# Altium PCB LOGi-SDR.PcbDoc
Units mil, origin at the board's own origin, x right, y up, seen from the top; angles counter-clockwise.
Board outline 2700 x 1700 mil, 4 copper layers (Top Layer, GND, VDD, Bottom Layer); 4 components, 0 nets, 130 pads, 36 vias.
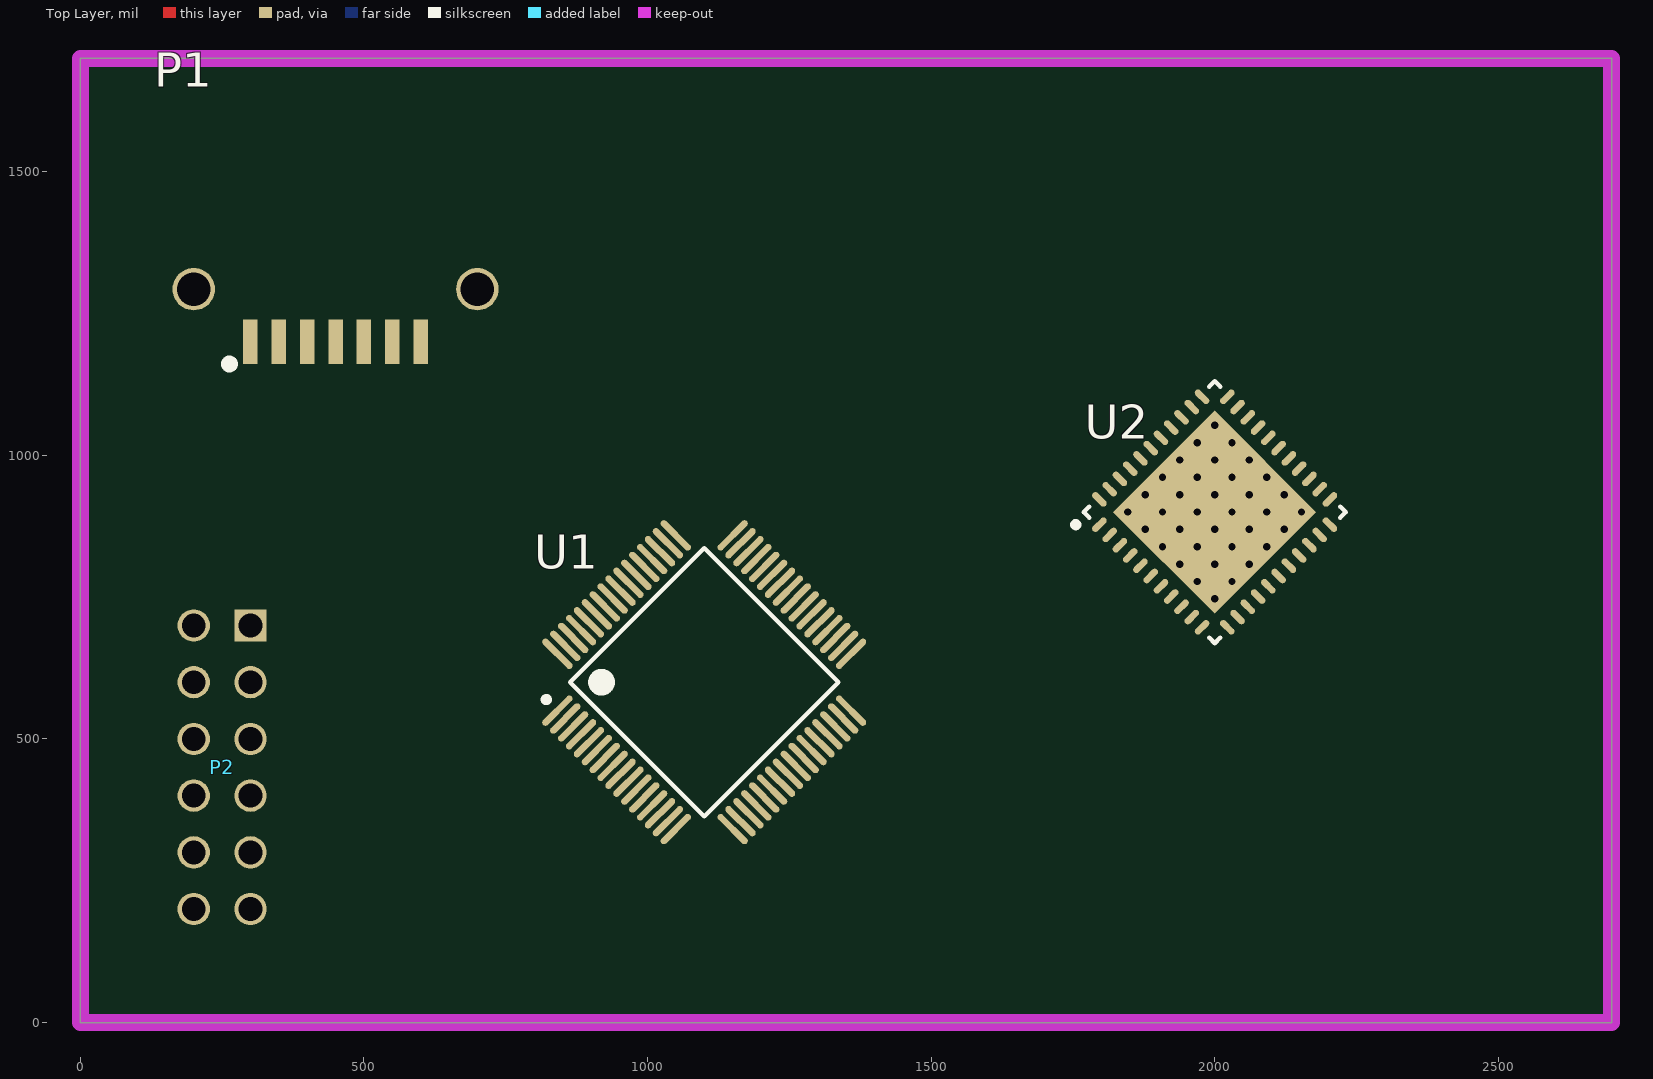
[diagram p0: Top Layer view]
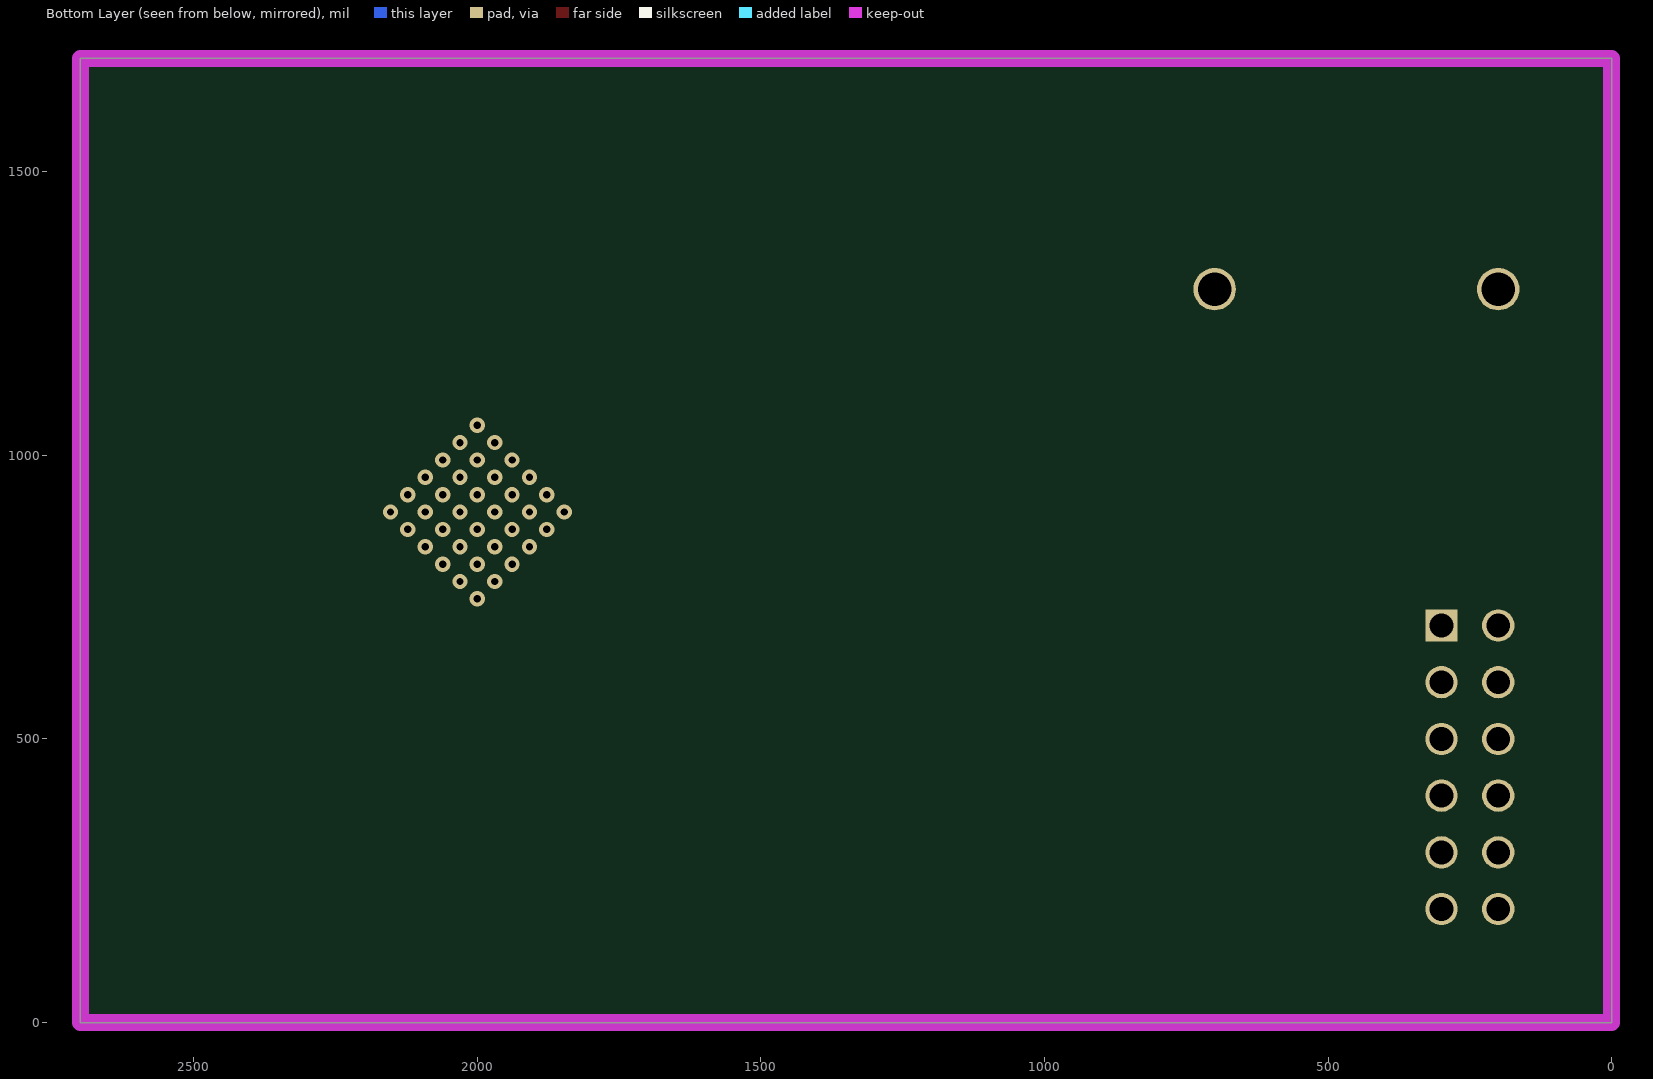
[diagram p1: Bottom Layer view, seen from below]

## Layer stack, top to bottom
Top Layer: signal copper 1.4
Dielectric: core 12.6, FR-4, Dk 4.8
GND: signal copper 1.4
Dielectric: prepreg 12.6, FR-4, Dk 4.8
VDD: signal copper 1.4
Dielectric: core 12.6, FR-4, Dk 4.8
Bottom Layer: signal copper 1.4

## Board outline
0,0 2700,0 2700,1700 0,1700

## Design rules (kind name [scope] priority, off if disabled: settings)
Clearance POLY_IN_BGA [(WithinRoom('BGA_INNER'))] p1: gap=6
Clearance POLY_TO_POLY [inpoly vs inpoly] p2: gap=12
Clearance [All] p3: gap=6
FabricationTestPointUsage TestPointUsage [All] p1: valid=0 allowmultiple=FALSE
FabricationTestpoint Testpoint [All] p1: side=3 testpointundercomponent=TRUE minsize=40 maxsize=100 preferedsize=60 minholesize=0 maxholesize=40 preferedholesize=32 testpointgrid=1 allowsidetop=TRUE allowsidebottom=TRUE usegrid=TRUE gridtolerance=0.01
PlaneClearance [All] p1: clearance=10
PlaneConnect via-plane [isvia] p1: planeconnectstyle=Direct reliefexpansion=20 reliefentries=4 reliefconductorwidth=10 reliefairgap=10
PlaneConnect [All] p2: planeconnectstyle=Relief reliefexpansion=20 reliefentries=4 reliefconductorwidth=10 reliefairgap=10
PolygonConnect via-poly [isvia] p1: connectstyle=Direct reliefconductorwidth=10 reliefentries=4 polygonreliefangle="90 Angle" airgapwidth=10
PolygonConnect [All] p2: connectstyle=Relief reliefconductorwidth=10 reliefentries=4 polygonreliefangle="90 Angle" airgapwidth=10
RoutingLayers [All] p1: top layer_v5=TRUE mid layer 1_v5=FALSE mid layer 2_v5=FALSE bottom layer_v5=TRUE
RoutingVias [All] p1: holewidth=13 width=27 viastyle="Through Hole" minholewidth=13 minwidth=27 maxholewidth=25 maxwidth=40
SilkscreenOverComponentPads [All] p1: minsilkscreentomaskgap=10
SolderMaskExpansion VIA [isvia and not(locked)] p1: expansion=-100
SolderMaskExpansion SolderMaskExpansion_1 [All] p2: expansion=4
Width differentila-pair [inDifferentialPair(HDMI_D1) or inDifferentialPair(HDMI_D2) or inDifferentialPair(HDMI_D3) or inDifferentialPair(HDMI_D4)] p1: maxlimit=10 minlimit=10 preferedwidth=10
Width [All] p2: maxlimit=30 minlimit=6 preferedwidth=14
22 further rules are at their usual default settings.

## Classes and differential pairs
component class LOGi-SDR: P1 P2 U2

## Components (designator, comment, footprint, x,y, rotation, side; value= is the part's Value field where it differs from the comment)
P1 "SATA - 67490-1220" "SATA - 67490-3220" 300,1200 r180 top
P2 "MTSW-106-07-G-D-130-RA" "PMOD HEADER - Male" 300,700 r90 top
U1 "Comment" TQFP-PT64_N 1100,600 r45 top
U2 "PIC32MX250F128D-I/ML" MCHP-QFN-ML44_M 2000,900 r45 top

## Footprints (in the part's own frame and the unit in brackets; to place one, negate y for a bottom-side part, rotate by r counter-clockwise, add the part's x,y. Pads: shape width x height; smd on the part's side, far side on the other; paste and mask are expansions set on the pad)
MCHP-QFN-ML44_M [mm] "QFN, 44-Leads, Body 8x8mm, Pitch 0.65mm, Thermal Pad 6.425x6.425mm, IPC Low Density"
  oval 0.8x0.3 smd: 1(-4.05,3.25) 2(-4.05,2.6) 3(-4.05,1.95) 4(-4.05,1.3) 5(-4.05,0.65) 6(-4.05,0) 7(-4.05,-0.65) 8(-4.05,-1.3) 9(-4.05,-1.95) 10(-4.05,-2.6) 11(-4.05,-3.25) 23(4.05,-3.25) 24(4.05,-2.6) 25(4.05,-1.95) 26(4.05,-1.3) 27(4.05,-0.65) 28(4.05,0) 29(4.05,0.65) 30(4.05,1.3) 31(4.05,1.95) 32(4.05,2.6) 33(4.05,3.25)
  rect 6.43x6.43 smd: 6(0,0)
  oval 0.3x0.8 smd: 12(-3.25,-4.05) 13(-2.6,-4.05) 14(-1.95,-4.05) 15(-1.3,-4.05) 16(-0.65,-4.05) 17(0,-4.05) 18(0.65,-4.05) 19(1.3,-4.05) 20(1.95,-4.05) 21(2.6,-4.05) 22(3.25,-4.05) 34(3.25,4.05) 35(2.6,4.05) 36(1.95,4.05) 37(1.3,4.05) 38(0.65,4.05) 39(0,4.05) 40(-0.65,4.05) 41(-1.3,4.05) 42(-1.95,4.05) 43(-2.6,4.05) 44(-3.25,4.05)
  silkscreen extent -4.92,-4.15 4.15,4.15, body extent -4,-4 4,4, height 1
"PMOD HEADER - Male" [mil] "68021-212HLF"
  rect 57x57 hole 42: 1(0,0)
  round 57 hole 42: 2(-100,0) 3(-200,0) 4(-300,0) 5(-400,0) 6(-500,0) 7(0,100) 8(-100,100) 9(-200,100) 10(-300,100) 11(-400,100) 12(-500,100)
  body extent -550,-10 50,536, height 225
"SATA - 67490-3220" [mm] "Sata Data header 67490-3220 - verified pin nums on datasheet 1=gnd 2=tx+"
  rect 0.65x2 smd: 1(0,0) 2(-1.27,0) 3(-2.54,0) 4(-3.81,0) 5(-5.08,0) 6(-6.35,0) 7(-7.62,0)
  round 1.9 hole 1.5: x(-10.16,-2.36) x(2.54,-2.36)
  silkscreen extent 0.81,0.86 1.07,1.12, body extent -12.9,-10.66 4.57,0.84, height 4
TQFP-PT64_N [mm]
  oval 1.8x0.3 smd: 1(-5.55,3.75) 2(-5.55,3.25) 3(-5.55,2.75) 4(-5.55,2.25) 5(-5.55,1.75) 6(-5.55,1.25) 7(-5.55,0.75) 8(-5.55,0.25) 9(-5.55,-0.25) 10(-5.55,-0.75) 11(-5.55,-1.25) 12(-5.55,-1.75) 13(-5.55,-2.25) 14(-5.55,-2.75) 15(-5.55,-3.25) 16(-5.55,-3.75) 33(5.55,-3.75) 34(5.55,-3.25) 35(5.55,-2.75) 36(5.55,-2.25) 37(5.55,-1.75) 38(5.55,-1.25) 39(5.55,-0.75) 40(5.55,-0.25) 41(5.55,0.25) 42(5.55,0.75) 43(5.55,1.25) 44(5.55,1.75) 45(5.55,2.25) 46(5.55,2.75) 47(5.55,3.25) 48(5.55,3.75)
  oval 0.3x1.8 smd: 17(-3.75,-5.55) 18(-3.25,-5.55) 19(-2.75,-5.55) 20(-2.25,-5.55) 21(-1.75,-5.55) 22(-1.25,-5.55) 23(-0.75,-5.55) 24(-0.25,-5.55) 25(0.25,-5.55) 26(0.75,-5.55) 27(1.25,-5.55) 28(1.75,-5.55) 29(2.25,-5.55) 30(2.75,-5.55) 31(3.25,-5.55) 32(3.75,-5.55) 49(3.75,5.55) 50(3.25,5.55) 51(2.75,5.55) 52(2.25,5.55) 53(1.75,5.55) 54(1.25,5.55) 55(0.75,5.55) 56(0.25,5.55) 57(-0.25,5.55) 58(-0.75,5.55) 59(-1.25,5.55) 60(-1.75,5.55) 61(-2.25,5.55) 62(-2.75,5.55) 63(-3.25,5.55) 64(-3.75,5.55)
  silkscreen extent -5.67,-4.25 4.25,4.57, body extent -5,-5 5,5, height 1.2

## Part data
P1: "SATA Data - 67490-1220"
P2: library part "P-MOD - MTSW-106-07-G-D-130-RA", "Samtec Male Conn Unshrouded Header HDR 12 POS 2.54mm Solder RA Thru-Hole"
U2: library part "MCU PIC32MX2X0FXXXD-44_A", "32-bit Microcontroller with Audio and Graphics Interface, USB and Advanced Analog, 50 MHz, 33 I/O, PMP, -40 to 85 degC, 44-pin QFN (ML44), Tube"

## Via types
v1: diameter 27, hole 13, Top Layer to Bottom Layer, 36 vias

## Nets (pads, with @x,y where several pads share a name; then routed paths per layer and width w, separated by ;. In a path a pad name is that pad's centre, name@x,y a point inside that pad or via, vN(x,y) a via of type N, cw(c..) or ccw(c..) an arc to the next point about the centre after c; other vN are vias at no path point)
pads on no net: P1.1 P1.2 P1.3 P1.4 P1.5 P1.6 P1.7 P1.x P2.1 P2.2 P2.3 P2.4 P2.5 P2.6 P2.7 P2.8 P2.9 P2.10 P2.11 P2.12 U1.1 U1.2 U1.3 U1.4 U1.5 U1.6 U1.7 U1.8 U1.9 U1.10 U1.11 U1.12 U1.13 U1.14 U1.15 U1.16 U1.17 U1.18 U1.19 U1.20 U1.21 U1.22 U1.23 U1.24 U1.25 U1.26 U1.27 U1.28 U1.29 U1.30 U1.31 U1.32 U1.33 U1.34 U1.35 U1.36 U1.37 U1.38 U1.39 U1.40 U1.41 U1.42 U1.43 U1.44 U1.45 U1.46 U1.47 U1.48 U1.49 U1.50 U1.51 U1.52 U1.53 U1.54 U1.55 U1.56 U1.57 U1.58 U1.59 U1.60 U1.61 U1.62 U1.63 U1.64 U2.1 U2.2 U2.3 U2.4 U2.5 U2.6 U2.7 U2.8 U2.9 U2.10 U2.11 U2.12 U2.13 U2.14 U2.15 U2.16 U2.17 U2.18 U2.19 U2.20 U2.21 U2.22 U2.23 U2.24 U2.25 U2.26 U2.27 U2.28 U2.29 U2.30 U2.31 U2.32 U2.33 U2.34 U2.35 U2.36 U2.37 U2.38 U2.39 U2.40 U2.41 U2.42 U2.43 U2.44
copper on no net:
  other v1: 2000,746.89 1969.38,777.51 2030.62,777.51 1938.75,808.13 2000,808.13 2061.25,808.13 1908.13,838.75 1969.38,838.75 2030.62,838.75 2091.87,838.75 1877.51,869.38 1938.75,869.38 2000,869.38 2061.25,869.38 2122.49,869.38 1846.89,900 1908.13,900 1969.38,900 2030.62,900 2091.87,900 2153.11,900 1877.51,930.62 1938.75,930.62 2000,930.62 2061.25,930.62 2122.49,930.62 1908.13,961.25 1969.38,961.25 2030.62,961.25 2091.87,961.25 1938.75,991.87 2000,991.87 2061.25,991.87 1969.38,1022.49 2030.62,1022.49 2000,1053.11

## Keep-outs
Keep-Out Layer:
  the board outline again, w30

## Silkscreen, mask and mechanical layers (free items; w line width, h text height)
Mechanical 2:
  lines w10: -120,60 -100,0 ; -120,1940 -100,2000 ; -110,0 -90,0 ; -110,2000 -90,2000 ; -100,719.09 -100,0 ; -100,1280.91 -100,2000 ; -80,60 -100,0 ; -80,1940 -100,2000 ; 0,-110 0,-90 ; 60,-120 0,-100 ; 60,-80 0,-100 ; 1219.09,-100 0,-100 ; 1780.91,-100 3000,-100 ; 2940,-120 3000,-100 ; 2940,-80 3000,-100 ; 3000,-110 3000,-90
  text "2000 (mil)" at -64.01,729.09 h60 r90
  text "3000 (mil)" at 1229.09,-135.99 h60
Mechanical 3:
  lines w20: -4300,1700 -1900,1700 ; -4300,3800 4650,3800
  text "PCB Fabrication Notes" at -4280,3920 h150
  text "Unless otherwise specified, all dimensions are in inches" at -4285,3600 h100
  text "Overall Dimension:  3.471\"  x  2.685\"" at -4300,3500 h100
  text "Finished Thickness:  .062\"" at -4300,3400 h100
  text "Layer Count: 4" at -4300,3300 h100
  text "Drill Count:" at -4300,3200 h100
  text ".Hole_Count" at -3700,3200 h100
  text "PAD Count:" at -4300,3100 h100
  text ".PAD_Count" at -3700,3100 h100
  text "Component Count:" at -4300,3000 h100
  text ".Component_Count" at -3500,3000 h100
  text "Via Count:" at -4300,2900 h100
  text ".Via_Count" at -3700,2900 h100
  text ".Via_Count" at -3700,2800 h100
  text "Solder Mask:  Black" at -4300,2600 h100
  text "Legend:  White Non-Conductive Ink LPI Process" at -4300,2500 h100
  text "RS274-X Gerber Format, 2.5 Leading Zeros Suppressed" at -4300,2400 h100
  text "Excellon Drill Format, 2.5 Trailing Zeros Suppressed" at -4300,2300 h100
  text "Layer Details" at -4300,1800 h100
  text "4-Layer Stackup" at -3500,1800 h100
  text "POLARITY" at -2600,1800 h100
  text ".GTL - Top Copper" at -4300,1600 h100
  text "POSITIVE" at -2600,1600 h100
  text ".G1 - Inner Copper (Ground)" at -4300,1500 h100
  text "POSITIVE" at -2600,1500 h100
  text ".G2 - Inner Copper (VDD)" at -4300,1400 h100
  text "POSITIVE" at -2600,1400 h100
  text ".GBL - Bottom Copper" at -4300,1300 h100
  text "POSITIVE" at -2600,1300 h100
  text ".GTO - Top Silkscreen" at -4300,1100 h100
  text ".GBO - Bottom Silkscreen" at -4300,1000 h100
  text ".GTP - Top Solder Paste" at -4300,900 h100
  text ".GBP - Bottom Solder Paste" at -4300,800 h100
  text ".GTS -  Top Solder Mask" at -4300,700 h100
  text ".GBS - Bottom Solder Mask" at -4300,600 h100
  text ".GKO - Board Outline" at -4300,500 h100
  text ".GM1 - 3D Part Bodies - System" at -4300,400 h100
  text ".GM2 - Board Dimensions" at -4300,300 h100
  text ".GM3 - Single Board Fabrication Notes" at -4300,200 h100
  text ".GM4 - Single Board Score/Tab Route" at -4300,100 h100
  text ".GM13 - 3D Body Alt" at -4300,0 h100
  text ".GM15 - Assembly Outlines" at -4300,-100 h100
  text ".GM20 - Panel Dimensions" at -4300,-200 h100
  text ".GM21 - Panel Score/Tab Route" at -4300,-300 h100
  text ".GM22 - Panel Dimensions" at -4300,-400 h100
  text ".TXT/.DRL - NC-Drill" at -4300,-600 h100
Mechanical 16:
  lines w5: -5600,-1325 -5400,-1325 ; -5600,1450 -5400,1450 ; -5600,4225 -5400,4225 ; -3660,-4100 -3660,-3900 ; -3660,6800 -3660,7000 ; -1725,-4100 -1725,-3900 ; -1725,6800 -1725,7000 ; 210,-4100 210,-3900 ; 210,6800 210,7000 ; 2150,-4100 2150,-3900 ; 2150,6800 2150,7000 ; 4085,-4100 4085,-3900 ; 4085,6800 4085,7000 ; 5200,-3600 9700,-3600 ; 5200,-3300 9700,-3300 ; 6020,-4100 6020,-3900 ; 6020,6800 6020,7000 ; 6700,-3900 6700,-3300 6700,-3000 5200,-3000 5200,-3900 ; 7960,-4100 7960,-3900 ; 7960,6800 7960,7000 ; 8800,-3900 8800,-3300 ; 9700,-3000 3800,-3000 3800,-3900 5200,-3900 ; 9700,-2700 9700,-3900 ; 9700,-1325 9900,-1325 ; 9700,1450 9900,1450 ; 9700,4225 9900,4225 ; 5200,-3900 9700,-3900 ; 9700,-3900 -5400,-3900 -5400,6800 9700,6800 9700,-3900 ; -5600,-4100 -5600,7000 9900,7000 9900,-4100 -5600,-4100
  text "1" at -4653.66,6865 h70
  text "2" at -2723,6865 h70
  text "3" at -783.66,6865 h70
  text "4" at 1157,6865 h70
  text "5" at 3097,6865 h70
  text "6" at 5027,6865 h70
  text "7" at 6977,6865 h70
  text "8" at 8907,6865 h70
  text "A" at -5525,5527 h70
  text "A" at 9775,5527 h70
  text "B" at -5525,2747 h70
  text "B" at 9775,2747 h70
  text "C" at -5525,-33 h70
  text "C" at 9775,-33 h70
  text "D" at -5525,-2793 h70
  text "D" at 9775,-2793 h70
  text "PCB DESIGNER:" at 5250,-3095 h45
  text "TITLE:" at 6800,-3100 h45
  text "Michael Jones" at 5315,-3230 h70
  text "DATE:" at 5250,-3400 h45
  text "PART NO.:" at 6750,-3400 h45
  text "REV:" at 8850,-3400 h45
  text ".PRINT_DATE" at 5300,-3520 h70
  text "FILE NAME:" at 5250,-3700 h45
  text "DWG NO:" at 6750,-3700 h45
  text "SCALE:" at 8850,-3700 h45
  text ".PCB_FILE_NAME_NO_PATH" at 5300,-3820 h70
  text "1" at -4653.66,-4035 h70
  text "2" at -2723,-4035 h70
  text "3" at -783.66,-4035 h70
  text "4" at 1157,-4035 h70
  text "5" at 3097,-4035 h70
  text "6" at 5027,-4035 h70
  text "7" at 6977,-4035 h70
  text "8" at 8907,-4035 h70